# EAGLE board LoRaMicrobit1.0 (EAGLE 8.2.2)
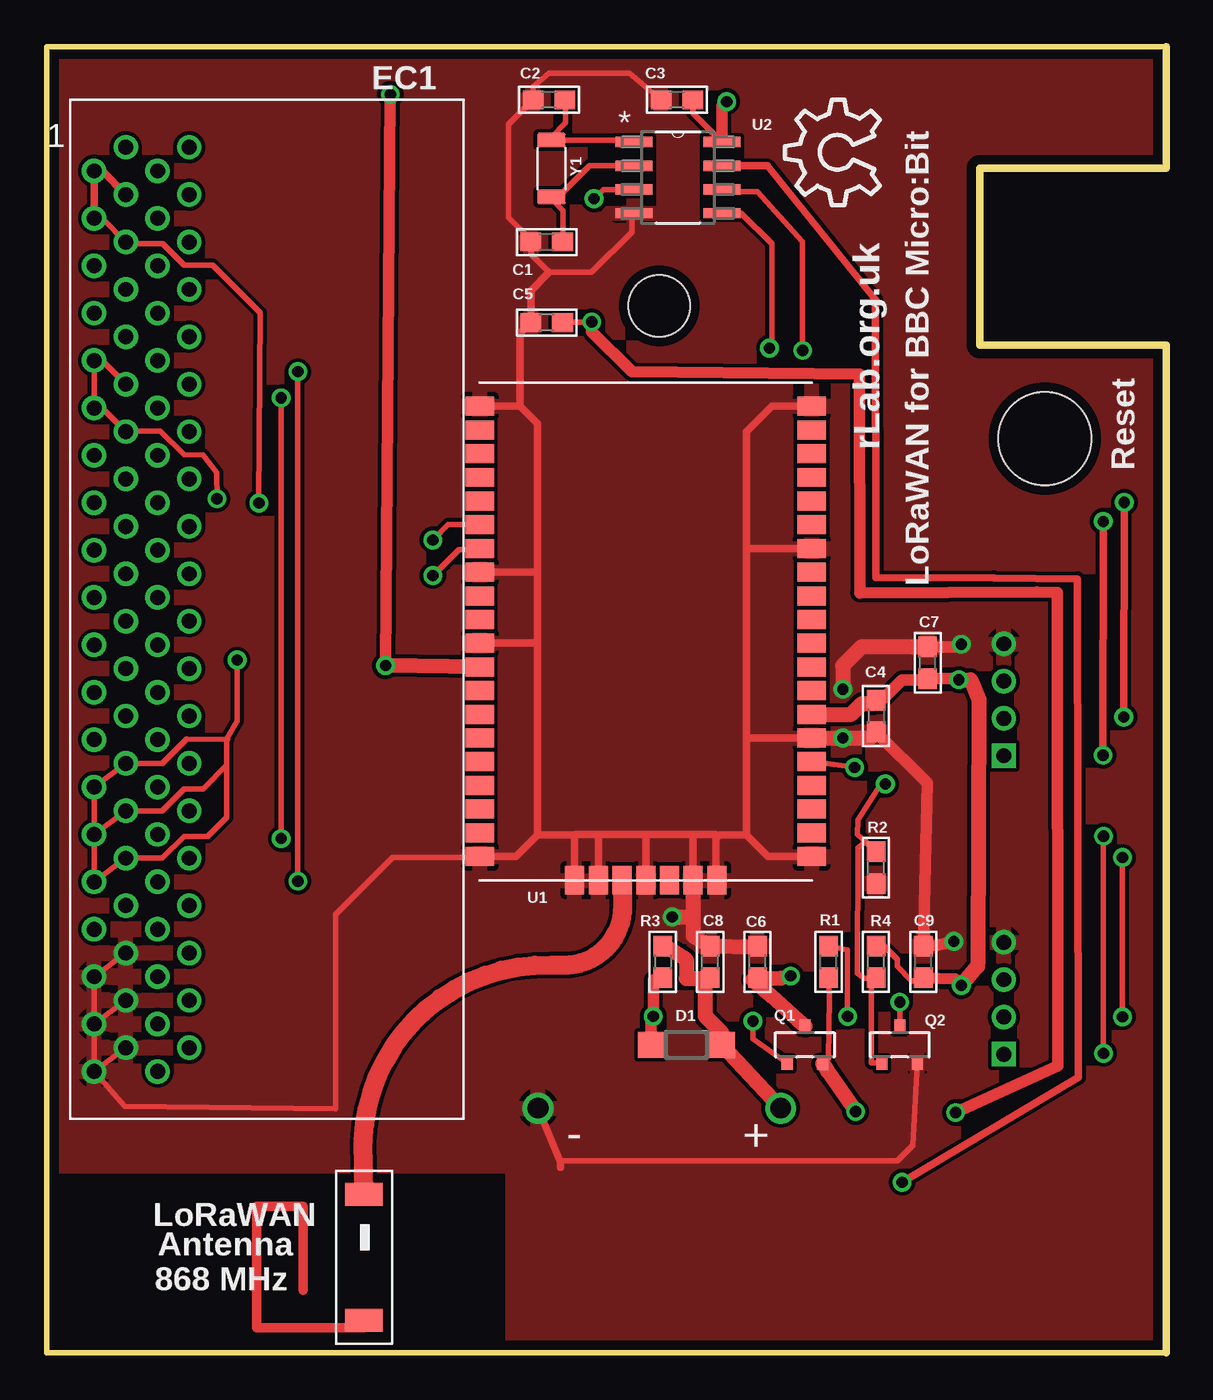
[diagram p0: board, top side]
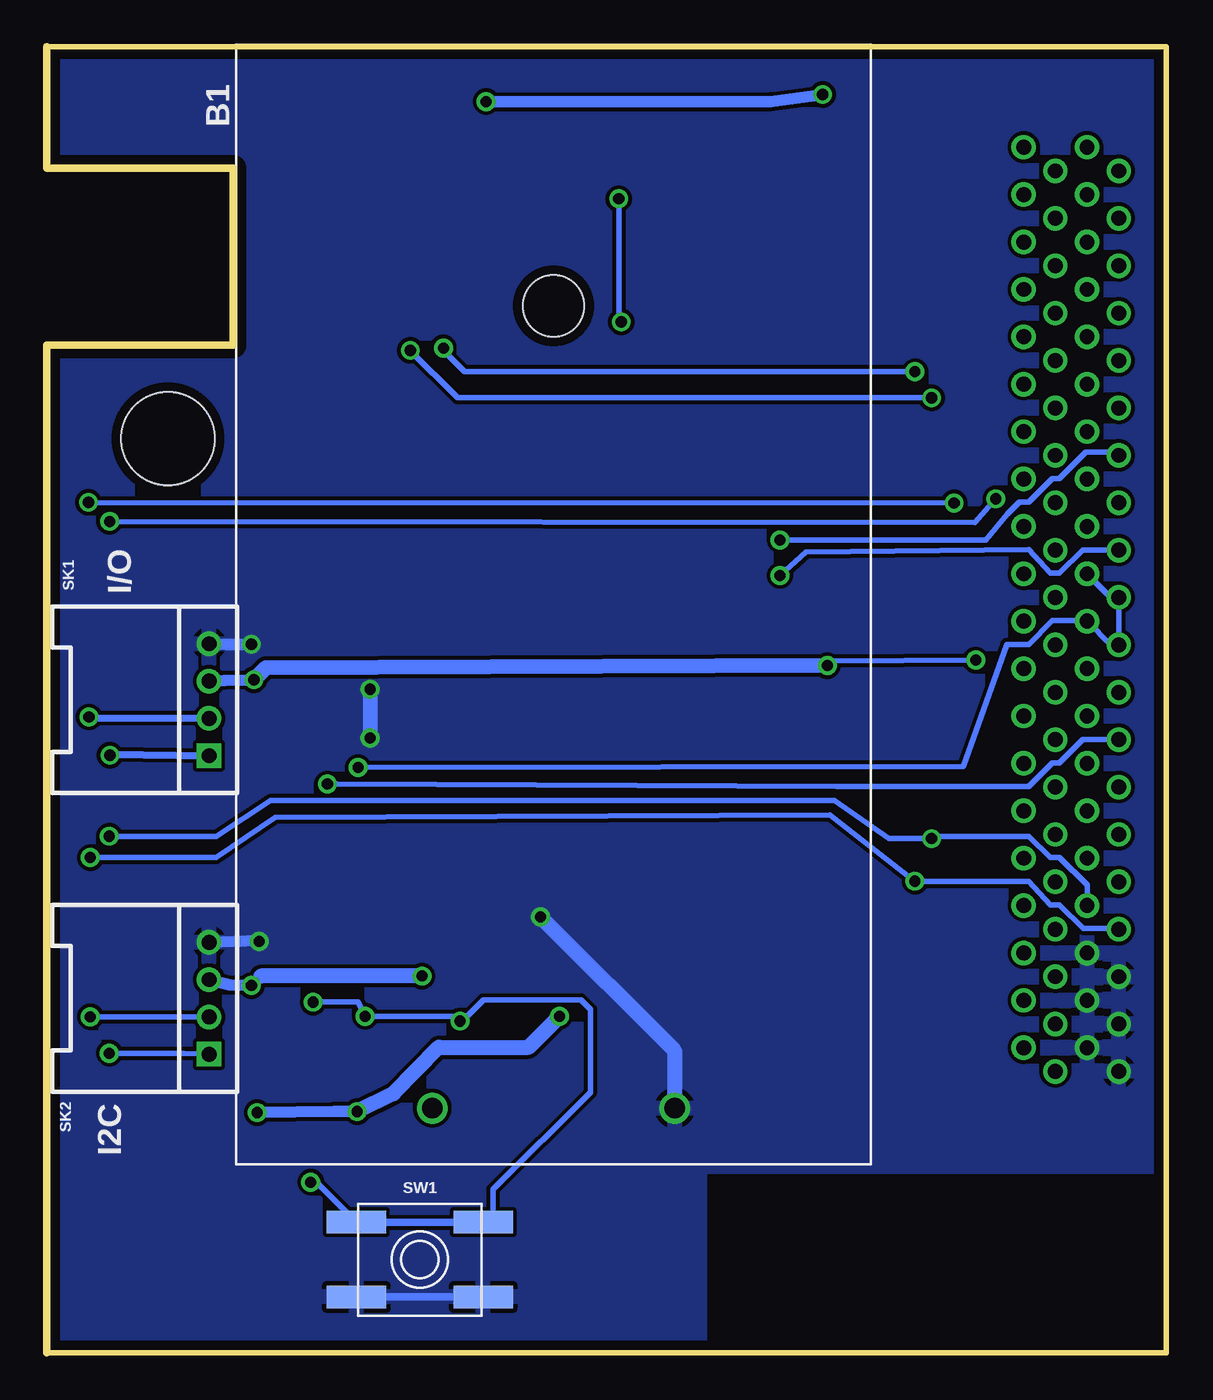
[diagram p1: board, bottom side, seen from below]

Size 60 x 70 mm. Coordinates in mm from the lower left corner, seen from the top.
Outline: 0,0 60,0 60,54 50,54 50,63.5 60,63.5 60,70 0,70 0,0
Copper layers (1*16): Top 0.035mm / dielectric 1.5mm / Bottom 0.035mm
Design rules "pcbway *": minimum track width 6mil, minimum drill 0.3mm, track to track 0.205mm, track to pad 0.205mm, pad to pad 0.205mm, via to via 0.205mm, smd to smd 8mil, copper to edge 20mil, drill to drill 8mil, minimum pad ring 10mil, minimum via ring 8mil, stop-mask expansion 4mil, vias tented up to drill 25mil, thermal gap 10mil
Holes 5 mm at 53.5,49

## Footprints (pad centres in the part's own frame; a part is rotated, then mirrored left to right if it is on the bottom)
2AABATTERY = drill 1.1: + 10.5,3; - 23.5,3 | hole 3.3: 17,46
0603 = smd 1.1 x 1: 1 -0.85,0; 2 0.85,0
SOD123 = smd 1.4 x 1.4: A 1.9,0; C -1.9,0
CARDEDGE80 = drill 0.8: 1 1.7,49.53; 2 0,48.26; 3 1.7,46.99; 4 0,45.72; 5 1.7,44.45; 6 0,43.18; 7 1.7,41.91; 8 0,40.64; 9 1.7,39.37; 10 0,38.1; 11 1.7,36.83; 12 0,35.56; 13 1.7,34.29; 14 0,33.02; 15 1.7,31.75; 16 0,30.48; 17 1.7,29.21; 18 0,27.94; 19 1.7,26.67; 20 0,25.4; 21 1.7,24.13; 22 0,22.86; 23 1.7,21.59; 24 0,20.32; 25 1.7,19.05; 26 0,17.78; 27 1.7,16.51; 28 0,15.24; 29 1.7,13.97; 30 0,12.7; 31 1.7,11.43; 32 0,10.16; 33 1.7,8.89; 34 0,7.62; 35 1.7,6.35; 36 0,5.08; 37 1.7,3.81; 38 0,2.54; 39 1.7,1.27; 40 0,0; 41 5.1,49.53; 42 3.4,48.26; 43 5.1,46.99; 44 3.4,45.72; 45 5.1,44.45; 46 3.4,43.18; 47 5.1,41.91; 48 3.4,40.64; 49 5.1,39.37; 50 3.4,38.1; 51 5.1,36.83; 52 3.4,35.56; 53 5.1,34.29; 54 3.4,33.02; 55 5.1,31.75; 56 3.4,30.48; 57 5.1,29.21; 58 3.4,27.94; 59 5.1,26.67; 60 3.4,25.4; 61 5.1,24.13; 62 3.4,22.86; 63 5.1,21.59; 64 3.4,20.32; 65 5.1,19.05; 66 3.4,17.78; 67 5.1,16.51; 68 3.4,15.24; 69 5.1,13.97; 70 3.4,12.7; 71 5.1,11.43; 72 3.4,10.16; 73 5.1,8.89; 74 3.4,7.62; 75 5.1,6.35; 76 3.4,5.08; 77 5.1,3.81; 78 3.4,2.54; 79 5.1,1.27; 80 3.4,0
SOT23-R = smd 0.6 x 0.7: 1 -0.95,-1; 2 0.95,-1; 3 0,1
HW4-2.0-90D = drill 0.8 pad 1.27 square: 1 -3,0 | drill 0.8 pad 1.27: 2 -1,0; 3 1,0; 4 3,0
EVQ-Q2 = smd 3.2 x 1.2: A -3.4,-2; A' 3.4,-2; B -3.4,2; B' 3.4,2
RN2483 = smd 1.524 x 1.016: GND 17.78,1.27; GND1 17.78,10.16; GND2 17.78,13.97; GND3 17.78,25.4; GND9 0,25.4; GND10 0,19.05; GND11 0,8.89; GND12 0,1.27; GPIO0 0,16.51; GPIO1 0,15.24; GPIO2 0,13.97; GPIO3 0,12.7; GPIO4 0,11.43; GPIO5 0,10.16; GPIO6 0,6.35; GPIO7 0,5.08; GPIO8 0,3.81; GPIO9 0,2.54; GPIO10 17.78,17.78; GPIO11 17.78,16.51; GPIO12 17.78,12.7; GPIO13 17.78,11.43; P$1 0,21.59; P$2 0,22.86; P$3 0,24.13; P$4 17.78,24.13; P$5 17.78,22.86; P$6 17.78,21.59; P$7 17.78,20.32; P$8 17.78,19.05; P$9 17.78,6.35; P$10 17.78,5.08; P$11 0,7.62; RESET° 0,20.32; UART_CTS 17.78,3.81; UART_RTS 17.78,2.54; UART_RX 17.78,8.89; UART_TX 17.78,7.62; VDD 17.78,15.24; VDD2 0,17.78 | smd 1.016 x 1.524: GND4 12.7,26.67; GND5 11.43,26.67; GND6 8.89,26.67; GND7 6.35,26.67; GND8 5.08,26.67; RFH 10.16,26.67; RFL 7.62,26.67
SOIC8-N_MC = smd 1.981 x 0.559: 1 -2.362,1.905; 2 -2.362,0.635; 3 -2.362,-0.635; 4 -2.362,-1.905; 5 2.362,-1.905; 6 2.362,-0.635; 7 2.362,0.635; 8 2.362,1.905
0868AT043A0020 = smd 1.25 x 2: P$1 0,0; P$2 6.75,0
X2-SMD-3.2X1.5X0.55MM = smd 0.762 x 1.524: 1 -1.524,0; 2 1.524,0

## Placement (x,y rotation side)
B1  2 off AA Alkaline Battery  [2AABATTERY]  49.83,10.11 0 bottom
C1  12pF  [0603]  26.8,59.53 180 top
C2  10pF  [0603]  26.92,67.15 180 top
C3  100nF  [0603]  33.78,67.15 180 top
C4  10uF  [0603]  44.45,34.13 270 top
C5  1uF  [0603]  26.8,55.21 180 top
C6  10uF  [0603]  38.1,20.95 90 top
C7  1uF  [0603]  47.22,36.98 90 top
C8  100nF  [0603]  35.56,20.95 90 top
C9  1uF  [0603]  46.99,20.95 90 top
D1  MBR0520LT  [SOD123]  34.29,16.51 0 top
EC1  CARDEDGE80  [CARDEDGE80]  2.54,15.08 0 top
Q1  FDN340P  [SOT23-R]  40.64,16.51 0 top
Q2  BSS138  [SOT23-R]  45.72,16.51 0 top
R1  100K  [0603]  41.91,20.95 90 top
R2  100K  [0603]  44.45,26 90 top
R3  0R  [0603]  33.02,20.95 270 top
R4  100K  [0603]  44.45,20.95 90 top
SK1  I/O  [HW4-2.0-90D]  51.3,35 90 bottom
SK2  I2C  [HW4-2.0-90D]  51.3,19 90 bottom
SW1  Power On  [EVQ-Q2]  40,5 0 bottom
U1  RN2483  [RN2483]  41,52 180 top
U2  MCP7940N  [SOIC8-N_MC]  33.83,62.98 0 top
U$1  [OSHW_10X200_NOTEXT]  44.65,61.49 90 top
U$2  0868AT43A0020  [0868AT043A0020]  17,8.5 270 top
Y1  32.768KHZ  [X2-SMD-3.2X1.5X0.55MM]  27.05,63.47 270 top

## Library data of the parts
B1 EC1 U2 U$2 = Microbit
C1-C9 Q1 Q2 R1-R4 = microbuilder
D1 = diode
SK1 SK2 = Seeed-OPL-Connector; VALUE: 4P-2.0-90D
SW1 = adafruit
U1 = tobias
U$1 = ohw-logo
Y1 = Seeed-Crystal Oscillator-2016; MPN: FC-135

## Nets
+3V3: C3.1 C4.1 C6.1 C7.1 C9.1 EC1.27 EC1.28 EC1.29 EC1.30 EC1.31 EC1.32 Q1.3 R4.2 SK1.3 SK2.3 U1.VDD U1.VDD2 U2.8
GND: B1.- C1.2 C2.2 C3.2 C4.2 C5.2 C6.2 C7.2 C8.2 C9.2 EC1.35 EC1.36 EC1.37 EC1.38 EC1.39 EC1.40 Q2.2 R2.1 SK1.4 SK2.4 SW1.A SW1.A' U1.GND U1.GND1 U1.GND2 U1.GND3 U1.GND4 U1.GND5 U1.GND6 U1.GND7 U1.GND8 U1.GND9 U1.GND10 U1.GND11 U1.GND12 U2.4
N$1: U1.RFH U$2.P$1
N$2: C2.1 U2.1 Y1.1
N$3: C1.1 U2.2 Y1.2
N$5: B1.+ C8.1 D1.A R3.1
N$8: C5.1 D1.C Q1.2 R1.1 R3.2 U2.3
N$9: Q1.1 Q2.3 R1.2 SW1.B SW1.B' U2.7
P0: EC1.2 EC1.3 EC1.4 EC1.5 SK1.2
P1: EC1.10 EC1.11 EC1.12 EC1.13 SK1.1
P2: EC1.19 EC1.20 EC1.21 EC1.22 U1.RESET°
P3: EC1.1
P4: EC1.6
P5: EC1.7
P6: EC1.8
P7: EC1.9
P8: EC1.14 U1.UART_TX
P9: EC1.15
P10: EC1.16
P11: EC1.17
P12: EC1.18 U1.UART_RX
P13: EC1.23
P15: EC1.25
P16: EC1.26 Q2.1 R2.2 R4.1
P19: EC1.33 SK2.1 U2.6
P20: EC1.34 SK2.2 U2.5

## Tracks (layer width: path | path; a pad name or v marks a point on that pad's centre or on a via)
+3V3  (via drill 0.6)
  Top 0.305: C3.1 34.63,66.44 U2.8 | 37.85,20 C6.1 | R4.2 44.87,21.8 45.59,21.08 45.59,20.7 46.35,19.94 47.1,19.94 C9.1 | EC1.30 EC1.32 EC1.31 6.19,26.51 7.37,27.69 8.64,27.69 9.65,28.7 9.65,32.89 10.2,33.87 10.22,36.51 v10.2,37.12 | EC1.30 EC1.28 EC1.27 6.19,31.59 7.49,32.89 9.7,32.87 9.68,32.87 | EC1.30 EC1.29 6.19,29.05 7.37,30.23 8.38,30.23 9.65,31.5 | 39.38,20.07 v39.88,20.19
  Top 0.61: C9.1 48.67,20.04 v49.02,19.68 | v48.9,36.07 48.83,36.13 C7.1 47.16,36.07 45.85,36.07 44.76,34.98 C4.1 | U2.8 36.19,66.8 v36.45,67.06 | v18.41,67.44 v18.16,36.83
  Top 0.813: U1.VDD2 43.11,34.22 43.69,34.8 44.27,34.8 C4.1 | Q1.3 40.28,17.81 38.84,19.13 37.85,20 | U1.VDD v18.16,36.83 | v48.9,36.07 49.53,36.07 49.96,35.03 49.91,21.01 49.89,20.7 v49.02,19.68 | C6.1 39.38,20.07
  Bottom 0.305: 48.51,20.19 v49.02,19.68 | v10.2,37.12 17.91,37.08 v18.16,36.83
  Bottom 0.61: v49.02,19.68 50.2,19.71 SK2.3 | v48.9,36.07 50.46,36.04 SK1.3 | v36.45,67.06 21.21,67.06 v18.41,67.44
  Bottom 0.813: v18.16,36.83 48.26,36.7 v48.9,36.07 | v39.88,20.19 48.51,20.19
GND  (via drill 0.6)
  Top 0.305: C3.2 31.25,68.58 26.92,68.58 26.07,67.86 C2.2 24.77,65.84 24.77,60.83 25.95,59.65 C1.2 25.95,58.89 26.92,57.91 29.21,57.91 31.37,60.07 31.37,60.98 U2.4 | Q2.2 46.42,11.11 45.59,10.29 27.64,10.29 27.55,10.2 | EC1.40 EC1.38 | EC1.38 EC1.36 EC1.35 | EC1.38 EC1.37 | EC1.40 EC1.39 | EC1.40 4.19,13.21 15.49,13.08 15.49,23.5 18.54,26.54 23.69,26.54 23.75,26.6
  Top 0.406: U1.GND4 28.3,27.71 | 28.3,27.71 arc-90 28.36,27.77 29.57,27.77 | 29.57,27.77 32.11,27.77 | 32.11,27.77 34.57,27.77 | 34.57,27.77 35.85,27.77 35.86,27.76 35.86,27.56 | 35.86,27.56 35.86,25.39 U1.GND8 | U1.GND7 34.65,27.69 34.57,27.77 | U1.GND5 29.57,27.77 | U1.GND6 32.11,27.77 | U1.GND3 23.75,26.6 25.15,26.6 26.3,27.75 | 26.3,27.75 28.26,27.75 28.3,27.71 | U1.GND9 38.65,26.6 37.5,27.75 | 37.5,27.75 36.05,27.75 35.86,27.56 | 37.5,27.75 37.5,32.81 | 37.5,32.81 37.5,43.07 | 37.5,43.07 37.5,49.36 38.87,50.73 U1.GND12 | U1.GND11 37.54,43.11 37.5,43.07 | U1.GND10 37.64,32.95 37.5,32.81 | 26.3,27.75 26.3,38.2 | 26.3,38.2 26.3,41.85 | 26.3,41.85 26.3,49.8 25.37,50.73 | 25.37,50.73 U1.GND | U1.GND1 26.29,41.84 26.3,41.85 | U1.GND2 26.13,38.03 26.3,38.2 | B1.- 27.55,10.2 27.55,9.95 | 25.37,50.73 25.37,54.63 C5.2 25.95,56.94 26.92,57.91
  Top 0.61: v48.62,22.05 47.71,21.84 C9.2 47.2,30.53 C4.2 | C7.2 48.88,37.83 v49.02,37.97
  Top 0.813: U1.GND10 v42.67,32.95 44.12,32.95 C4.2 | U1.GND7 34.65,23.5 | 34.65,23.5 34.65,22.34 C8.2 37.9,21.75 C6.2 | v33.53,23.37 34.52,23.37 34.65,23.5 | C7.2 43.67,37.83 42.67,36.83 v42.67,35.56
  Bottom 0.406: SW1.A SW1.A'
  Bottom 0.61: v48.62,22.05 48.61,22.1 SK2.4 | v49.02,37.97 50.37,37.95 SK1.4
  Bottom 0.813: B1.- 26.33,16.17 v33.53,23.37 | v42.67,35.56 v42.67,32.95
  pour Top: 0,70 59.99,69.83 60,0 25,0 25,10 0,10
  pour Bottom: 0,70 60,70 60,0 25,0 25,10 0,10
N$1
  Top 0.406: 30.88,25.29 arc90 U1.RFH
  Top 1.016: U$2.P$1 16.97,11.34 arc-90 27.06,20.78 27.76,20.78 arc90 30.88,23.9 30.88,25.29
N$2
  Top 0.305: U2.1 31.36,64.99 Y1.1 27.05,65.15 27.81,65.91 27.81,67.11 C2.1
N$3
  Top 0.305: C1.1 27.69,59.57 27.69,61.21 27.05,61.85 Y1.2 27.4,61.94 29.08,63.63 31.46,63.63 U2.2
N$4
  Top 0.5: 17,1.35 11.25,1.35 11.25,7.85 13.75,7.85 13.75,3.35
N$5
  Top 0.813: B1.+ 39.33,13.15 D1.A 36.19,17.15 35.31,18.03 35.31,19.98 C8.1 35.22,20.07 34.29,20.07 34.29,21.08 33.27,21.72 R3.1
N$8  (via drill 0.6)
  Top 0.305: U2.3 29.83,62.34 v29.34,61.85 | v29.21,55.24 27.68,55.24 C5.1 | R1.1 41.94,19.02 41.91,15.75 41.66,15.42 Q1.2
  Top 0.61: R3.2 32.51,19.98 v32.51,18.03 32.39,17.91 D1.C | v29.21,55.24 29.21,54.74 31.37,52.58 43.56,52.45 43.57,40.73 53.06,40.77 54.18,40.74 54.2,15.37 v48.72,12.88
  Top 0.813: Q1.2 41.87,15.08 v43.36,12.93
  Bottom 0.305: v29.34,61.85 29.34,55.37 v29.21,55.24
  Bottom 0.61: v48.72,12.88 44.58,12.95 v43.36,12.93
  Bottom 0.813: v43.36,12.93 41.4,13.89 38.99,16.38 34.16,16.38 v32.51,18.03
N$9  (via drill 0.6)
  Top 0.305: Q2.3 v45.72,18.8 | v37.85,17.78 37.85,16.81 Q1.1 39.51,15.35 | v42.93,18.03 42.93,21.59 R1.2
  Top 0.406: U2.7 38.62,63.62 44.43,56.45 44.44,42.78 44.44,41.54 50.79,41.53 55.24,41.48 55.3,14.76 v45.85,9.14
  Bottom 0.305: v45.72,18.8 43.31,18.8 v42.93,18.03 38.1,18.03 v37.85,17.78 37.72,17.78 36.58,18.92 31.37,18.92 30.86,18.41 30.86,13.97 36.07,8.76 36.07,7.53 SW1.B' | v45.85,9.14 45.54,9.14 SW1.B
  Bottom 0.406: SW1.B SW1.B'
P0  (via drill 0.6)
  Top 0.305: v11.37,45.55 11.43,55.75 8.89,58.29 7.37,58.29 6.22,59.44 4.33,59.44 | 2.97,60.8 EC1.5
  Top 0.406: v57.73,34.08 v57.76,45.58 | 4.33,59.44 EC1.5 | EC1.3 2.97,63.34 EC1.2 EC1.4 2.97,60.8
  Bottom 0.305: v57.76,45.58 v11.37,45.55
  Bottom 0.406: SK1.2 57.26,34.01 v57.73,34.08
P1  (via drill 0.6)
  Top 0.305: v9.13,45.77 9.12,47.18 8.38,48.1 7.37,48.13 6.1,49.4 4.27,49.4 | EC1.10 EC1.12 | 2.97,53.18 EC1.11 | 2.97,50.64 EC1.13
  Top 0.406: 4.27,49.4 EC1.13 | EC1.10 2.97,53.18 | EC1.12 2.97,50.64 | v56.61,32.03 56.64,44.42 v56.62,44.56
  Bottom 0.305: v56.62,44.56 10.24,44.5 v9.13,45.77
  Bottom 0.406: SK1.1 56.59,32.06 v56.61,32.03
P2  (via drill 0.6)
  Top 0.305: U1.RESET° 43,31.43 v43.31,31.37
  Bottom 0.305: v43.31,31.37 10.87,31.43 8.53,37.95 7.37,37.97 6.1,39.24 4.27,39.24 EC1.21 3,37.97 2.54,37.97 | EC1.22 2.54,37.97 | 2.54,37.97 EC1.20 2.97,40.48 EC1.19
P8  (via drill 0.6)
  Top 0.305: U1.UART_TX 21.52,44.38 v20.7,43.56
  Bottom 0.305: v20.7,43.56 9.65,43.56 8.51,44.96 7.87,45.59 7.37,45.59 6.1,46.86 5.71,46.86 4.32,48.26 2.7,48.26 EC1.14
P12  (via drill 0.6)
  Top 0.305: v20.7,41.66 22.1,43.05 23.16,43.05 U1.UART_RX
  Bottom 0.305: EC1.18 4.48,43.02 5.71,41.78 6.22,41.78 7.37,43.05 19.3,42.93 v20.7,41.66
P16  (via drill 0.6)
  Top 0.305: v44.96,30.48 44.7,30.48 43.48,28.55 43.46,27.77 43.88,27.41 | 43.88,27.41 R2.2 | 43.88,27.41 43.47,27.06 43.46,20.34 43.81,20.07 44.06,20.07 R4.1 44.1,20.03 44.2,19.94 44.2,15.54 44.74,15.54 Q2.1
  Bottom 0.305: EC1.26 4.48,32.86 5.71,31.62 6.1,31.62 7.37,30.35 17.65,30.35 44.45,30.48 v44.96,30.48
P19  (via drill 0.6)
  Top 0.305: v12.57,27.56 v12.57,51.18 | v40.51,53.72 40.51,59.54 38.1,62.23 36.31,62.23 U2.6 | v56.64,27.69 v56.64,16.05
  Bottom 0.305: EC1.33 4.24,25.07 5.71,26.54 6.22,26.54 7.37,27.69 12.45,27.69 v12.57,27.56 14.86,27.56 17.78,29.59 48.01,29.59 50.93,27.69 v56.64,27.69 | v12.57,51.18 37.97,51.18 v40.51,53.72 | v56.64,16.05 52.65,16.05 SK2.1
P20  (via drill 0.6)
  Top 0.305: U2.5 37.22,61.08 38.86,59.44 38.86,53.98 v38.73,53.85 | v13.46,52.58 v13.46,25.27 | v57.66,18.01 v57.66,26.54
  Bottom 0.305: v38.73,53.85 38.73,53.72 37.59,52.58 v13.46,52.58 | EC1.34 2.51,22.73 4.45,22.73 5.71,24 6.22,24 7.37,25.27 v13.46,25.27 18.03,28.83 47.75,28.7 50.93,26.54 v57.66,26.54 | SK2.2 56.63,18 v57.66,18.01

## Text on the board
tPlace: rLab.org.uk | LoRaWAN | Antenna | 868 MHz
bPlace: I/O | I2C
tNames: Reset | LoRaWAN for BBC Micro:Bit | - | +